# Altium PCB adapter.PcbDoc
Units mm, origin at the board's own origin, x right, y up, seen from the top; angles counter-clockwise.
Board outline 25.1 x 46.94 mm, 2 copper layers (Top Layer, Bottom Layer), stack 1.671 mm thick; 11 components, 28 nets, 88 pads, 25 vias.
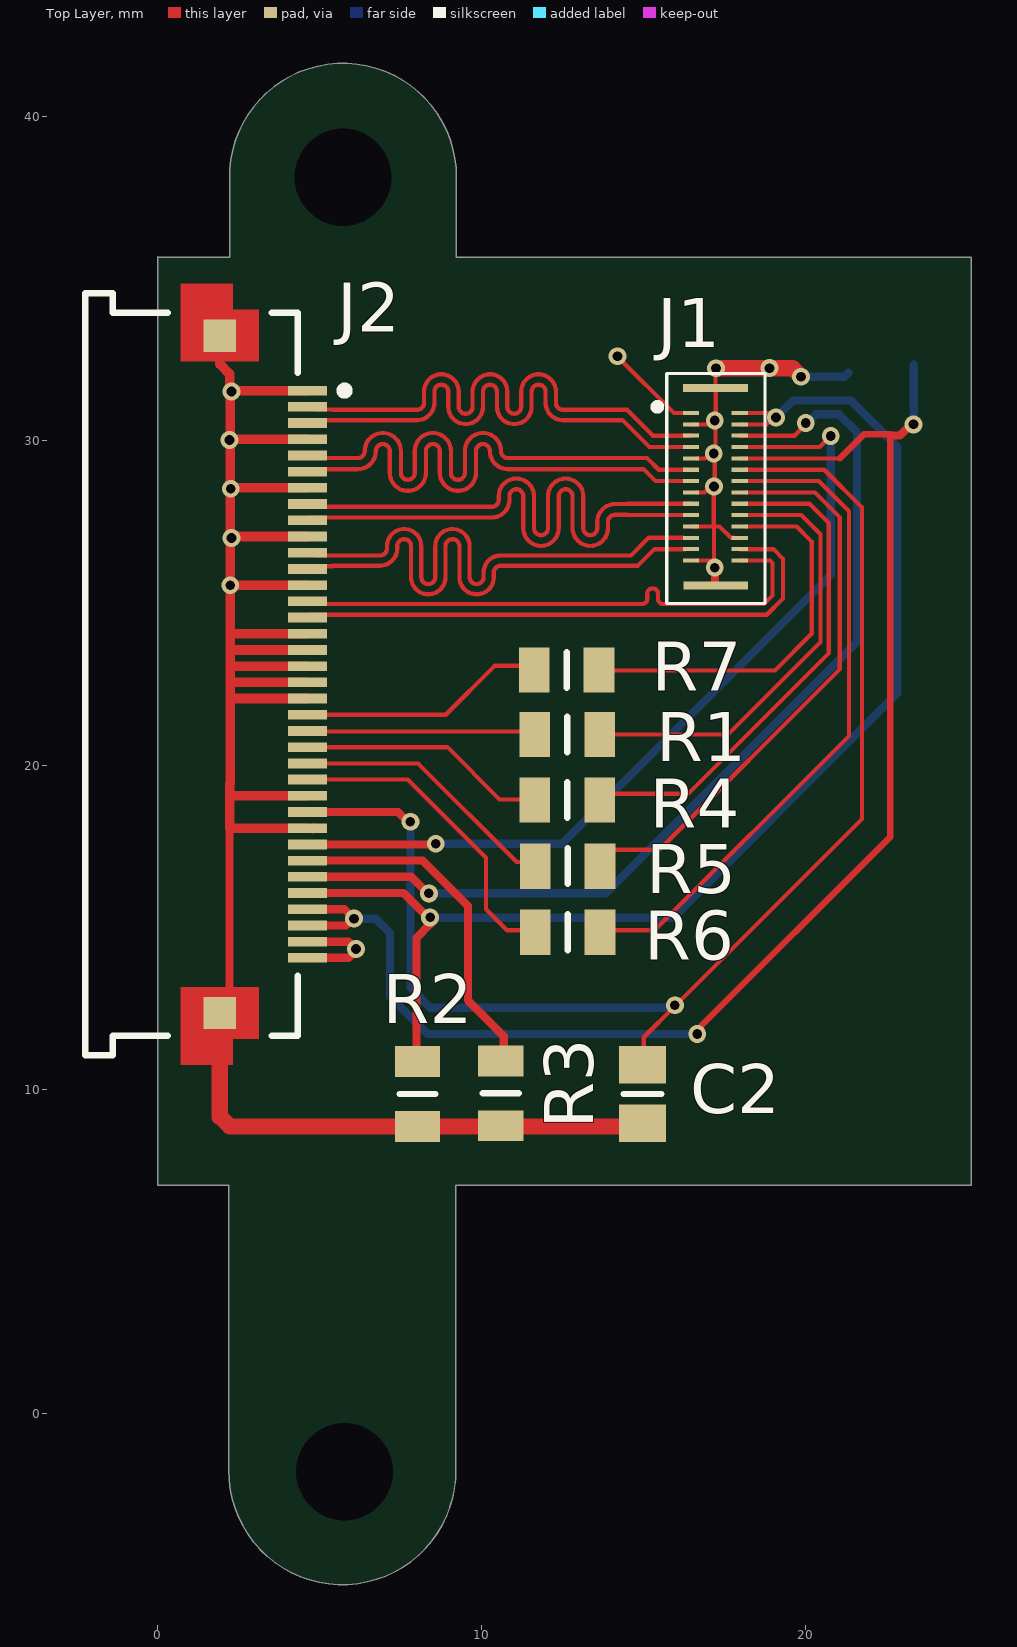
[diagram p0: Top Layer view]
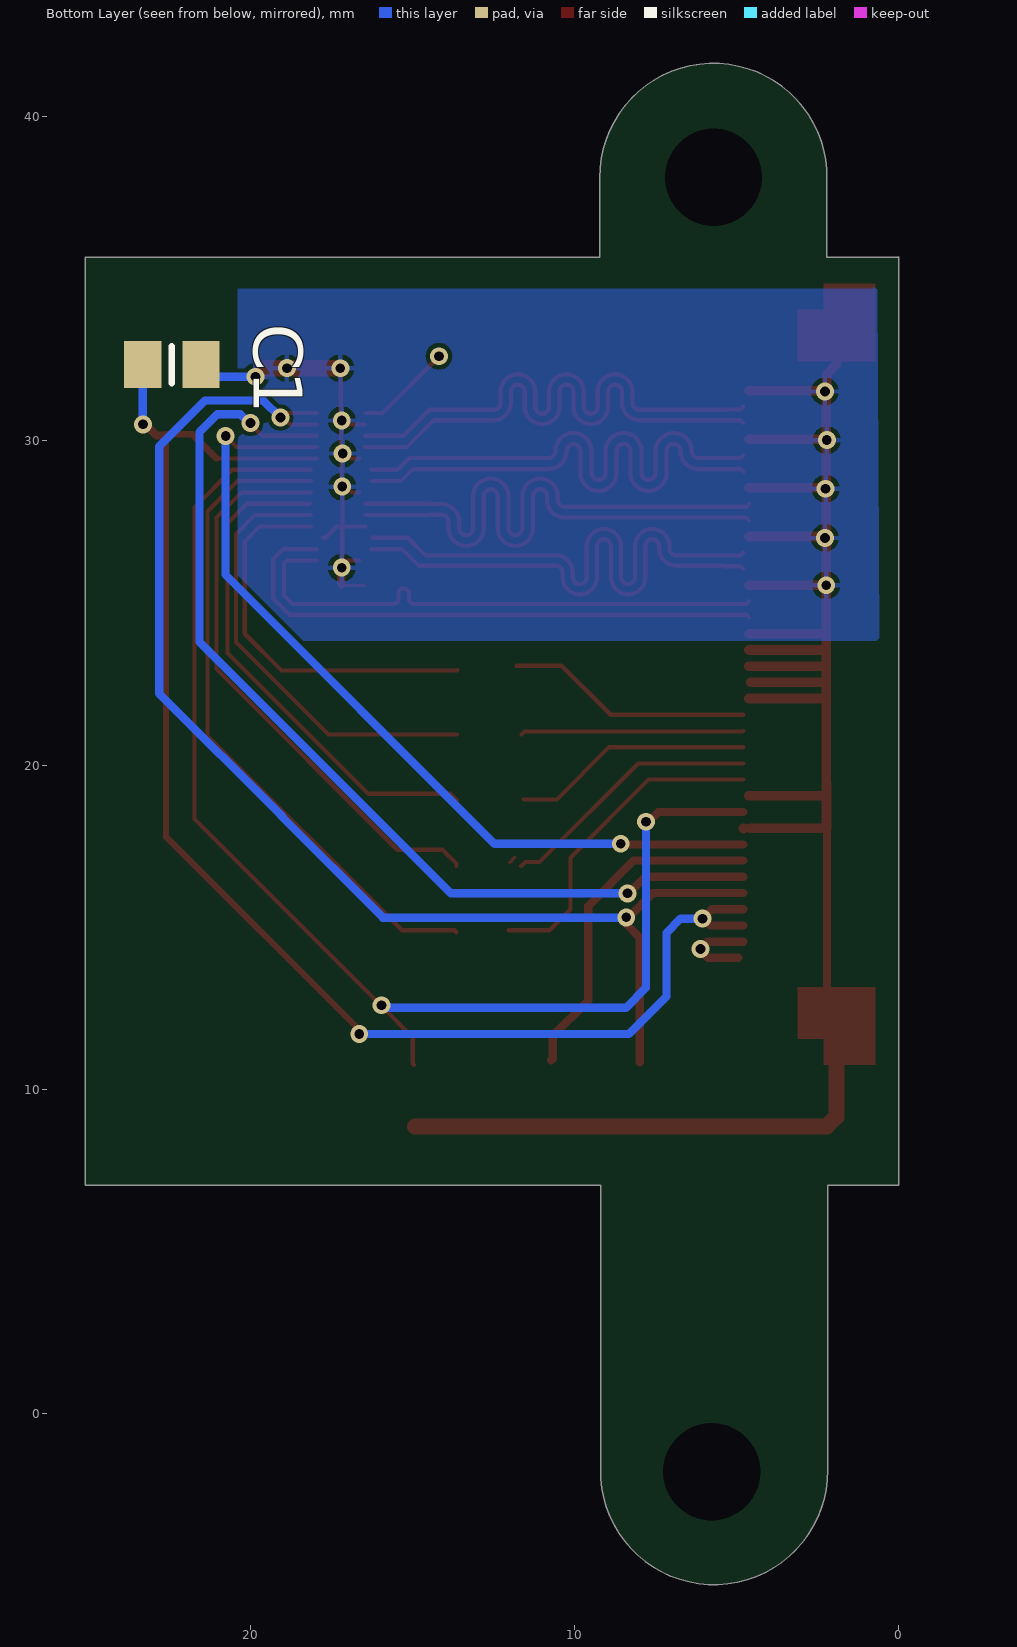
[diagram p1: Bottom Layer view, seen from below]
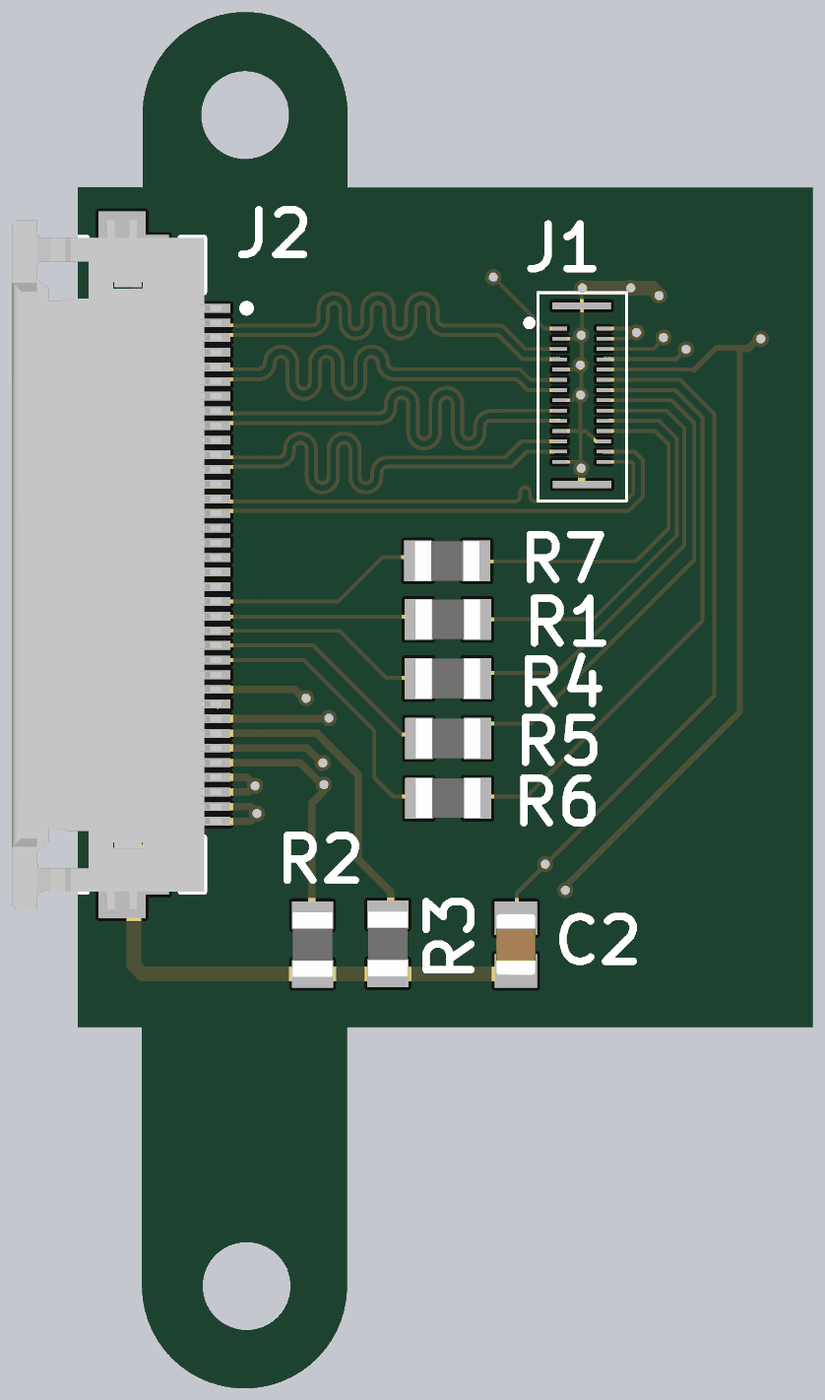
[diagram p2: 3D render of the assembled board from above, using the file's embedded part models]

## Layer stack, top to bottom
Top Solder: solder mask 0.0102, Solder Resist, Dk 3.5
Top Layer: signal copper 0.0356
Dielectric 1: dielectric 1.6, FR-4, Dk 4.8
Bottom Layer: signal copper 0.0356
Bottom Solder: solder mask 0.0102, Solder Resist, Dk 3.5

## Board outline
0,7.03 0,35.68 0,35.67 2.22,35.67 2.22,38.03 2.221,38.072 cw(c5.72,38.15) 9.22,38.118 9.22,38.09 9.22,35.67 25.1,35.67 25.1,7.03 9.2,7.03 9.2,-1.69 9.199,-1.712 cw(c5.7,-1.79) 2.2,-1.758 2.2,-1.74 2.2,7.03

## Design rules (kind name [scope] priority, off if disabled: settings)
Clearance "Schematic Clearance Constraint" [InNetClass('DPHY_LANES')] p1: gap=0.1 ignorepadtopadclearanceinfootprint=FALSE
Clearance [All] p2: gap=0.13 ignorepadtopadclearanceinfootprint=FALSE
DiffPairsRouting [All] p1: maxlimit=0.254 minlimit=0.13 mostfreqgap=0.2 toplayer_minwidth=0.13 toplayer_maxwidth=0.14 toplayer_prefwidth=0.13 bottomlayer_minwidth=0.13 bottomlayer_maxwidth=0.14 bottomlayer_prefwidth=0.13 maxuncoupledlength=12.7
MatchedLengths "Schematic Matched Net Lengths" [InNetClass('DPHY_LANES')] p1: tolerance=0.5 checknetsindiffpair=FALSE checkdiffpairvsdiffpair=TRUE checkxsignals=TRUE checkothers=TRUE
MatchedLengths global_rule [InDifferentialPairClass('All Differential Pairs')] p2: tolerance=0.5 checknetsindiffpair=FALSE checkdiffpairvsdiffpair=TRUE checkxsignals=TRUE checkothers=TRUE
MatchedLengths diff_pair_3 [InDifferentialPair('MIPI_TX_DATA3')] p3: tolerance=0.5 checknetsindiffpair=TRUE checkdiffpairvsdiffpair=FALSE checkxsignals=FALSE checkothers=FALSE
MatchedLengths diff_pair_4 [InDifferentialPair('MIPI_TX_DATA4')] p4: tolerance=0.5 checknetsindiffpair=TRUE checkdiffpairvsdiffpair=FALSE checkxsignals=FALSE checkothers=FALSE
MatchedLengths diff_pair_clk [InDifferentialPair('MIPI_TX_CLK')] p5: tolerance=0.5 checknetsindiffpair=TRUE checkdiffpairvsdiffpair=FALSE checkxsignals=FALSE checkothers=FALSE
MatchedLengths diff_pair_2 [InDifferentialPair('MIPI_TX_DATA2')] p6: tolerance=0.5 checknetsindiffpair=TRUE checkdiffpairvsdiffpair=FALSE checkxsignals=FALSE checkothers=FALSE
MatchedLengths diff_pair_1 [InDifferentialPair('MIPI_TX_DATA1')] p7: tolerance=0.5 checknetsindiffpair=TRUE checkdiffpairvsdiffpair=FALSE checkxsignals=FALSE checkothers=FALSE
MinimumSolderMaskSliver [All] p1: minsoldermaskwidth=0.05
PolygonConnect [All] p1: connectstyle=Relief reliefconductorwidth=0.15 reliefentries=4 polygonreliefangle="90 Angle" airgapwidth=0.15
RoutingVias [All] p1: holewidth=0.3 width=0.55 viastyle="Through Hole" minholewidth=0.3 minwidth=0.5 maxholewidth=0.3 maxwidth=0.7
SilkToSilkClearance [All] p1: silktosilkclearance=0.1
SilkToSolderMaskClearance [IsPad] p1: minsilkscreentomaskgap=0.1 clearancetoexposedcopper=TRUE
SolderMaskExpansion [All] p1: expansion=0.102 istentingtop=FALSE
UnRoutedNet [All] p1: checkbadconnections=TRUE
Width "Schematic Width Constraint_9" [InNet('LCD_PANIC_L_CONN')] p1: maxlimit=0.2 minlimit=0.1 preferedwidth=0.1
Width "Schematic Width Constraint_8" [InNet('LCD_HIFA_BSYNC_CONN')] p2: maxlimit=0.2 minlimit=0.1 preferedwidth=0.1
Width "Schematic Width Constraint_7" [InNet('DSI_GPIO0')] p3: maxlimit=0.2 minlimit=0.1 preferedwidth=0.1
Width "Schematic Width Constraint_6" [InNet('DSI_GPIO1')] p4: maxlimit=0.2 minlimit=0.1 preferedwidth=0.1
Width "Schematic Width Constraint_5" [InNet('LCD_PIFA')] p5: maxlimit=0.2 minlimit=0.1 preferedwidth=0.1
Width "Schematic Width Constraint_4" [InNet('DSI_GPIO2')] p6: maxlimit=0.2 minlimit=0.1 preferedwidth=0.1
Width "Schematic Width Constraint_3" [InNet('DSI_GPIO3')] p7: maxlimit=0.2 minlimit=0.1 preferedwidth=0.1
Width "Schematic Width Constraint" [InNetClass('DPHY_LANES')] p8: maxlimit=0.1 minlimit=0.1 preferedwidth=0.1
Width signals [InNetClass('signals')] p9: maxlimit=0.3 minlimit=0.1 preferedwidth=0.13
Width diff_pairs [InNetClass('Differential_pairs')] p10: maxlimit=0.13 minlimit=0.13 preferedwidth=0.13
Width misc [InNetClass('misc')] p11: maxlimit=0.254 minlimit=0.1 preferedwidth=0.13
25 further rules are at their usual default settings.

## Classes and differential pairs
net class misc_nets: DSI_GPIO0 DSI_GPIO1 DSI_GPIO2 DSI_GPIO3 DSI_RESET_N LCD_HIFA_BSYNC_CONN LCD_PANIC_L_CONN LCD_PIFA LCD_PWR_EN_CONN LCD_RESET_L_CONN
net class DPHY_LANES: DPHY_0_N DPHY_0_P DPHY_1_N DPHY_1_P DPHY_2_N DPHY_2_P DPHY_3_N DPHY_3_P DPHY_4_N DPHY_4_P
differential pair DPHY_4: +DPHY_4_P -DPHY_4_N
differential pair DPHY_3: +DPHY_3_P -DPHY_3_N
differential pair DPHY_2: +DPHY_2_P -DPHY_2_N
differential pair DPHY_1: +DPHY_1_P -DPHY_1_N
differential pair DPHY_0: +DPHY_0_P -DPHY_0_N

## Components (designator, comment, footprint, x,y, rotation, side; value= is the part's Value field where it differs from the comment)
C1 "100nF" CAPC2012X88N 22.43,32.35 r0 bottom
C2 "100nF" CAPC2012X88N 14.96,9.85 r90 top
J1 "AA22L-P028VA1" AA22L-P028VA1 15.5,23.97 r0 top
J2 "54104-3633" MOLX-54104-3633 3.27,22.8 r270 top
R1 "0" RESC2012X60N 12.64,20.94 r0 top
R2 "100" RESC2012X60N 8.02,9.85 r90 top
R3 "100" RESC2012X60N 10.59,9.87 r90 top
R4 "0" RESC2012X60N 12.64,18.92 r0 top
R5 "0" RESC2012X60N 12.65,16.88 r0 top
R6 "0" RESC2012X60N 12.65,14.84 r0 top
R7 "0" RESC2012X60N 12.62,22.93 r0 top

## Footprints (in the part's own frame and the unit in brackets; to place one, negate y for a bottom-side part, rotate by r counter-clockwise, add the part's x,y. Pads: shape width x height; smd on the part's side, far side on the other; paste and mask are expansions set on the pad)
AA22L-P028VA1 [mm]
  rect 0.5x0.125 smd: 1(2.46,6.89) 2(0.96,6.89) 3(2.46,6.54) 4(0.96,6.54) 5(2.46,6.19) 6(0.96,6.19) 7(2.46,5.84) 8(0.96,5.84) 9(2.46,5.49) 10(0.96,5.49) 11(2.46,5.14) 12(0.96,5.14) 13(2.46,4.79) 14(0.96,4.79) 15(2.46,4.44) 16(0.96,4.44) 17(2.46,4.09) 18(0.96,4.09) 19(2.46,3.74) 20(0.96,3.74) 21(2.46,3.39) 22(0.96,3.39) 23(2.46,3.04) 24(0.96,3.04) 25(2.46,2.69) 26(0.96,2.69) 27(2.46,2.34) 28(0.96,2.34)
  rect 2x0.25 smd: 29(1.72,1.57) 30(1.71,7.66)
  silkscreen extent -0.17,1.01 3.24,8.11, body extent -0.33,3.51 -0.33,3.51, height 0.25
CAPC2012X88N [mm] "Chip Capacitor, Body 2.0x1.25mm, IPC Medium Density"
  rect 1.15x1.45 smd: 1(-0.9,0) 2(0.9,0)
  silkscreen extent 0,-0.58 0,0.58, body extent -1.05,-0.67 1.05,0.68, height 0.9
MOLX-54104-3633 [mm] "FPC Connector, 36-Leads, Right Angle, Pitch 0.5 mm, Mated Height 2.0 mm, SMT"
  rect 0.3x1.2 smd: 1(-8.75,1.35) 2(-8.25,1.35) 3(-7.75,1.35) 4(-7.25,1.35) 5(-6.75,1.35) 6(-6.25,1.35) 7(-5.75,1.35) 8(-5.25,1.35) 9(-4.75,1.35) 10(-4.25,1.35) 11(-3.75,1.35) 12(-3.25,1.35) 13(-2.75,1.35) 14(-2.25,1.35) 15(-1.75,1.35) 16(-1.25,1.35) 17(-0.75,1.35) 18(-0.25,1.35) 19(0.25,1.35) 20(0.75,1.35) 21(1.25,1.35) 22(1.75,1.35) 23(2.25,1.35) 24(2.75,1.35) 25(3.25,1.35) 26(3.75,1.35) 27(4.25,1.35) 28(4.75,1.35) 29(5.25,1.35) 30(5.75,1.35) 31(6.25,1.35) 32(6.75,1.35) 33(7.25,1.35) 34(7.75,1.35) 35(8.25,1.35) 36(8.75,1.35)
  rect 1x1 smd mask+0: MP1(-10.45,-1.35) MP2(10.45,-1.35)
  Top Layer region: -9.65,-2.55 -9.65,-0.15 -11.25,-0.15 -11.25,-0.95 -12.05,-0.95 -12.05,-2.55
  Top Layer region: 9.65,-2.55 9.65,-0.15 11.25,-0.15 11.25,-0.95 12.05,-0.95 12.05,-2.55
  silkscreen extent -11.75,-5.5 11.75,2.63, body extent -11.75,-5.5 11.75,1.65, height 2.06
RESC2012X60N [mm] "Chip Resistor, EIA 0805, Metric 2012, Body 2.0x1.2mm, IPC Medium Density"
  rect 0.95x1.4 smd: 1(-1,0) 2(1,0)
  silkscreen extent 0,-0.55 0,0.55, body extent -1.1,-0.67 1.1,0.68, height 0.6

## Part data
C1 C2: library part CC0805_100NF_50V_10%_X7R_YUDEN_UMK212B7104KGH, "Non-polarised capacitor", Case=0805, Manufacturer="TAIYO YUDEN", Manufacturer Part Number=UMK212B7104KGH, Tolerance=±10%, Voltage=50V, Author="CERN DEM JLC", Component Type=Standard, ComponentHeight=1.35mm, CreateDate=23.04.2015, HelpURL=\\cern.ch\dfs\Applications\Altium\Datasheets\CC0805_TAIYO-YUDEN_UMK212B7104KGH.pdf, LatestRevisionDate=23.04.2015, Mounted=Yes, Part Description="SMD Multilayer Chip Ceramic Capacitor (High Dielectric Type) for Automotive / Industrial Applications", Part Number=CC0805_100NF_50V_10%_X7R_YUDEN_UMK212B7104KGH, Pin Count=2, Sense=No, SMD=Yes, Socket=No, Status="Not Recommended", TC=X7R
J2: "0.5 mm Pitch Easy-On(TM) Type FPC Connector, 2.0 mm Mated Height, Right Angle, ZIF, SMT, Top Contact, 36 Circuits, -40 to 85 degC, ELV and RoHS Compliant, Tape and Reel", Current (Max per Contact)=0.5A, Manufacturer=Molex, Supplier Part Number 1=538-54104-3633, Voltage (Max)=50V, Circuits (Loaded)=36, ComponentLink1Description="Manufacturer URL", ComponentLink1URL=http://www.molex.com/molex/index.jsp, ComponentLink2Description=Datasheet, ComponentLink2URL=http://www.molex.com/webdocs/datasheets/pdf/en-us/0541043633_FFC_FPC_CONNECTORS.pdf, ComponentLink3Description="Package Specification", ComponentLink3URL=http://www.molex.com/pdm_docs/sd/541043633_sd.pdf, Contact Position=Top, Durability (mating cycles max)=20, Entry Angle="90degrees Angle", Mated Height=2.00mm, Material - Metal="Phosphor Bronze", Material - Plating Mating="Silver, Tin-Bismuth", Material - Plating Termination="Silver, Tin-Bismuth", Mounting Technology="Surface Mount", Number of Rows=1, Orientation="Right Angle", PackageDescription="36-Lead FPC Connector, Pitch 0.5 mm", PackageReference=54104-3633, PackageVersion="Rev. C, 04/2014", Packing="Tape and Reel", PartNumber=54104-3633, PCB Locator=No, PCB Retention=None, Pitch - Mating Interface=0.50mm, Pitch - Termination Interface=0.50mm, Polarized to PCB=Yes, RoHS=TRUE, Stackable=No, Supplier 1=Mouser
R1 R4 R5 R6 R7: library part R0805_0R_JUMPER, "Resistor", Case=0805, Manufacturer=GENERIC, Manufacturer1 ComponentHeight=0.6mm, Manufacturer1 Example="NIC COMPONENT", Manufacturer1 Part Number=NRC10Z0, Author="CERN DEM JLC", Component Type=Standard, CreateDate=03.12.2007, HelpURL=\\cern.ch\dfs\Applications\Altium\Datasheets\R0805_NIC_NRC.pdf, LatestRevisionDate=13.03.2008, Manufacturer Part Number=R0805_0R_JUMPER, Mounted=Yes, Part Description="2A (0.05R Max DC Resistance) Zero Ohm Jumper", Part Number=R0805_0R_JUMPER, Pin Count=2, PressFit=No, Sense=No, SMD=Yes, Socket=No, Status=Preferred
R2 R3: library part R0805_100R_1%_0.125W_100PPM, "Resistor - 1%", Case=0805, Manufacturer=GENERIC, Manufacturer1 ComponentHeight=0.6mm, Manufacturer1 Example="NIC COMPONENT", Manufacturer1 Part Number=NRC10F4700TRF, Power=0.125W, Tolerance=±1%, Author="CERN DEM JLC", Component Type=Standard, CreateDate=03.12.2007, HelpURL=\\cern.ch\dfs\Applications\Altium\Datasheets\R0805_NIC_NRC.pdf, LatestRevisionDate=13.03.2008, Manufacturer Part Number=R0805_100R_1%_0.125W_100PPM, Mounted=Yes, Part Description="General Purpose Thick Film Chip Resistor", Part Number=R0805_100R_1%_0.125W_100PPM, Pin Count=2, PressFit=No, Sense=No, SMD=Yes, Socket=No, Status=Preferred, TC=±100ppm/°C

## Free pads (board coordinates)
  round 1.524 hole 3 unplated: 1(5.72,38.137) 1(5.77,-1.803)

## Via types
v1: diameter 0.55, hole 0.3, Top Layer to Bottom Layer, tented both sides, 23 vias
v2: diameter 0.55, hole 0.3, Top Layer to Bottom Layer, 2 vias

## Nets (pads, with @x,y where several pads share a name; then routed paths per layer and width w, separated by ;. In a path a pad name is that pad's centre, name@x,y a point inside that pad or via, vN(x,y) a via of type N, cw(c..) or ccw(c..) an arc to the next point about the centre after c; other vN are vias at no path point)
1V8: C1.2 J1.9 J2.33 J2.34 | length 44.6
  Top Layer w0.13: v1(16.65,11.7) v1@16.65,11.83 ; J1.9 21.05,29.46
  Top Layer w0.2: v1@16.65,11.83 22.61,17.79 22.61,30.2 21.79,30.2 21.05,29.46
  Top Layer w0.254: J2.34@4.8,15.05 5.813,15.05 6.003,15.24 v1@6.07,15.24 ; J2.33@4.8,15.55 5.77,15.55 v1(6.06,15.26) ; 22.63,30.17 22.9,30.17 23.24,30.51 v1(23.32,30.51)
  Bottom Layer w0.254: v1@6.04,15.26 6.73,15.26 7.17,14.82 7.17,12.86 8.33,11.7 v1(16.65,11.7) ; v1(23.32,30.51) 23.33,30.52 C1.2
3V3: J2.35 J2.36 | length 2.7
  Top Layer w0.254: J2.35@4.8,14.55 5.89,14.55 6.14,14.3 5.89,14.05 J2.36@4.95,14.05
  other v2: 6.12,14.32
DPHY_0_N: J1.8 J2.3 | length 17.2
  Top Layer w0.13: J2.3@4.8,30.55 4.885,30.635 5.406,30.635 5.411,30.64 7.78,30.64 8.005,30.64 ccw(c8.005,31.175) 8.54,31.175 8.54,31.52 cw(c8.755,31.52) 8.97,31.52 8.97,31.052 ccw(c9.505,31.052) 10.04,31.052 10.04,31.52 cw(c10.255,31.52) 10.47,31.52 10.47,31.052 ccw(c11.005,31.052) 11.54,31.052 11.54,31.52 cw(c11.755,31.52) 11.97,31.52 11.97,31.175 ccw(c12.505,31.175) 12.505,30.64 13.169,30.64 14.348,30.64 15.178,29.81 J1.8
DPHY_0_P: J1.6 J2.2 | length 17.2
  Top Layer w0.13: J2.2@4.8,31.05 4.885,30.965 5.406,30.965 5.411,30.96 7.78,30.96 8.005,30.96 ccw(c8.005,31.175) 8.22,31.175 8.22,31.52 cw(c8.755,31.52) 9.29,31.52 9.29,31.052 ccw(c9.505,31.052) 9.72,31.052 9.72,31.52 cw(c10.255,31.52) 10.79,31.52 10.79,31.052 ccw(c11.005,31.052) 11.22,31.052 11.22,31.52 cw(c11.755,31.52) 12.29,31.52 12.29,31.175 ccw(c12.505,31.175) 12.505,30.96 13.169,30.96 14.48,30.96 15.28,30.16 J1.6
DPHY_1_N: J1.14 J2.6 | length 17
  Top Layer w0.13: J2.6@4.8,29.05 4.878,29.128 5.94,29.128 6.176,29.128 ccw(c6.176,29.685) 6.734,29.685 ; 6.734,29.686 cw(c6.949,29.686) 7.164,29.686 7.164,29.014 ccw(c7.721,29.014) 8.279,29.014 8.279,29.686 cw(c8.494,29.686) 8.709,29.686 8.709,29.014 ccw(c9.266,29.014) 9.824,29.014 9.824,29.686 cw(c10.039,29.686) 10.254,29.686 ; 10.254,29.685 ccw(c10.811,29.685) 10.811,29.128 11.625,29.128 14.993,29.128 15.36,28.76 J1.14@16.261,28.76
DPHY_1_P: J1.12 J2.5 | length 17
  Top Layer w0.13: J2.5@4.8,29.55 4.88,29.47 5.94,29.47 6.176,29.47 ccw(c6.176,29.685) 6.391,29.685 ; 6.391,29.686 cw(c6.949,29.686) 7.506,29.686 7.506,29.014 ccw(c7.721,29.014) 7.936,29.014 7.936,29.686 cw(c8.494,29.686) 9.051,29.686 9.051,29.014 ccw(c9.266,29.014) 9.481,29.014 9.481,29.686 cw(c10.039,29.686) 10.596,29.686 ; 10.596,29.685 ccw(c10.811,29.685) 10.811,29.47 11.625,29.47 15.103,29.47 15.463,29.11 J1.12@16.275,29.11
DPHY_2_N: J1.20 J2.9 | length 17.3
  Top Layer w0.13: J2.9 4.705,27.635 5.231,27.635 10.08,27.635 10.31,27.635 ccw(c10.31,28.18) 10.855,28.18 10.855,28.293 cw(c11.07,28.293) 11.07,28.508 cw(c11.07,28.293) 11.285,28.293 11.285,27.306 ccw(c11.83,27.306) 11.83,26.761 ccw(c11.83,27.306) 12.375,27.306 12.375,28.293 cw(c12.59,28.293) 12.59,28.508 cw(c12.59,28.293) 12.805,28.293 12.805,27.306 ccw(c13.35,27.306) 13.35,26.761 ccw(c13.35,27.306) 13.895,27.306 13.895,27.505 cw(c14.11,27.505) 14.11,27.72 14.481,27.72 14.491,27.71 14.793,27.71 J1.20
DPHY_2_P: J1.18 J2.8 | length 17.3
  Top Layer w0.13: J2.8 4.705,27.965 10.08,27.965 10.31,27.965 ccw(c10.31,28.18) 10.525,28.18 10.525,28.293 cw(c11.07,28.293) 11.07,28.838 cw(c11.07,28.293) 11.615,28.293 11.615,27.306 ccw(c11.83,27.306) 11.83,27.091 ccw(c11.83,27.306) 12.045,27.306 12.045,28.293 cw(c12.59,28.293) 12.59,28.838 cw(c12.59,28.293) 13.135,28.293 13.135,27.306 ccw(c13.35,27.306) 13.35,27.091 ccw(c13.35,27.306) 13.565,27.306 13.565,27.505 cw(c14.11,27.505) 14.11,28.05 14.481,28.05 14.491,28.06 14.793,28.06 J1.18
DPHY_3_N: J1.26 J2.12 | length 16.9
  Top Layer w0.13: J2.12@4.8,26.05 4.885,26.135 5.396,26.135 5.411,26.15 6.64,26.15 6.863,26.15 ccw(c6.863,26.68) 7.393,26.68 7.393,26.752 cw(c7.608,26.752) 7.823,26.752 7.823,25.795 ccw(c8.353,25.795) 8.883,25.795 8.883,26.752 cw(c9.098,26.752) 9.313,26.752 9.313,25.795 ccw(c9.842,25.795) 10.372,25.795 10.372,25.935 cw(c10.587,25.935) 10.587,26.15 11.288,26.15 14.82,26.15 15.33,26.66 J1.26@16.275,26.66
DPHY_3_P: J1.24 J2.11 | length 16.9
  Top Layer w0.13: J2.11@4.8,26.55 4.885,26.465 6.64,26.465 6.863,26.465 ccw(c6.863,26.68) 7.078,26.68 7.078,26.752 cw(c7.608,26.752) 8.138,26.752 8.138,25.795 ccw(c8.353,25.795) 8.568,25.795 8.568,26.752 cw(c9.098,26.752) 9.628,26.752 9.628,25.795 ccw(c9.842,25.795) 10.057,25.795 10.057,25.935 cw(c10.587,25.935) 10.587,26.465 11.288,26.465 14.605,26.465 15.15,27.01 J1.24@16.237,27.01
DPHY_4_N: J1.27 J2.14 | length 17.2
  Top Layer w0.13: J2.14 4.705,24.965 5.231,24.965 9.235,24.965 14.88,24.965 14.945,24.965 ccw(c14.945,25.13) 15.11,25.13 15.11,25.285 cw(c15.275,25.285) 15.275,25.45 cw(c15.275,25.285) 15.44,25.285 15.44,25.13 ccw(c15.605,25.13) 15.605,24.965 16.032,24.965 18.705,24.965 18.97,25.23 18.97,26.234 18.894,26.31 J1.27
DPHY_4_P: J1.25 J2.15 | length 17.6
  Top Layer w0.13: J2.15 4.705,24.635 9.372,24.635 11.37,24.635 13.51,24.635 18.795,24.635 19.3,25.14 19.3,26.361 19.001,26.66 J1.25
DSI_GPIO0: J2.22 R1.1 | length 6.9
  Top Layer w0.13: J2.22@4.8,21.05 4.82,21.03 11.55,21.03 R1.1
DSI_GPIO1: J2.23 R4.1 | length 7.4
  Top Layer w0.13: J2.23@4.8,20.55 8.94,20.55 10.55,18.94 R4.1@11.57,18.94
DSI_GPIO2: J2.24 R5.1 | length 8.4
  Top Layer w0.1: R5.1@11.85,17.15 R5.1@12.01,16.99
  Top Layer w0.13: J2.24@4.8,20.05 8.04,20.05 11.084,17.006 11.524,17.006 R5.1
DSI_GPIO3: J2.25 R6.1 | length 10.1
  Top Layer w0.13: J2.25@4.8,19.55 7.72,19.55 10.13,17.14 10.13,15.55 10.78,14.9 R6.1@12.04,14.9
DSI_RESET_N: J2.21 R7.1 | length 7.6
  Top Layer w0.13: J2.21@4.8,21.55 8.89,21.55 10.4,23.06 R7.1@11.8,23.06
GND: C1.1 C2.1 J1.4 J1.10 J1.16 J1.22 J1.23 J1.28 J1.29 J1.30 J2.1 J2.4 J2.7 J2.10 J2.13 J2.16 J2.17 J2.18 J2.19 J2.20 J2.26 J2.28 J2.MP1 J2.MP2 R2.1 R3.1 | length 81.8
  Top Layer w0.1: J1.29@16.49,25.535 J1.29@17.15,25.535
  Top Layer w0.13: C2.1 C2.1@14.979,8.969 ; J1.22 17.17,27.36 ; J1.4 16.956,30.51 17.107,30.661 17.221,30.661 17.221,31.699 J1.30@17.21,31.71 ; J1.28@16.645,26.31 v1@17.17,26.31 ; J1.16@16.645,28.41 16.876,28.41 17.056,28.59 v1(17.17,28.59) ; J1.10@16.645,29.46 16.896,29.46 17.046,29.61 v1(17.16,29.61) ; v1@17.17,26.1 v1@17.17,26.31 ; v1@17.211,30.649 17.211,29.661 v1(17.16,29.61) ; J1.30@17.211,31.711 17.211,32.221 v1(17.23,32.24) ; J1.23@17.775,27.01 17.69,27.01 17.34,27.36 17.17,27.36 ; v1(17.16,29.61) 17.191,29.579 17.191,28.611 v1(17.17,28.59) ; v1@17.17,26.31 17.17,27.36 ; 17.17,27.36 17.16,27.37 17.16,28.58 v1(17.17,28.59)
  Top Layer w0.254: 1.83,9.05 1.92,9.14 ; J2.MP2 2.22,12.65 2.22,18.12 ; v1(17.19,26.09) 17.2,26.08 J1.29@17.2,25.58
  Top Layer w0.3: J2.MP1 1.92,32.369 2.223,32.066 2.223,31.597 v1@2.27,31.55 ; 2.24,29.055 v1@2.24,28.54 ; 2.24,29.09 v1@2.24,30.05 ; v1@2.24,31.55 v1@2.24,30.05 ; v1(2.28,31.525) 2.305,31.55 4.082,31.55 J2.1 ; J2.19@4.56,22.55 2.24,22.55 ; J2.28@4.598,18.05 2.23,18.05 2.23,19.05 ; J2.26 2.23,19.05 ; J2.20 2.24,22.05 ; J2.18 2.24,23.05 ; J2.17 2.26,23.55 2.24,23.57 ; J2.16 2.27,24.05 2.24,24.08 ; J2.13 2.25,25.55 v1@2.24,25.54 ; J2.10 2.25,27.05 v1@2.24,27.06 ; J2.7 2.25,28.55 v1@2.24,28.54 ; J2.4 v1@2.24,30.05 ; J2.28@4.79,18.04 J2.28@4.8,18.05 ; 2.23,19.05 2.23,19.411 2.24,19.421 2.24,22.05 ; 2.24,22.05 2.24,22.55 ; 2.24,22.55 2.24,23.05 ; 2.24,23.05 2.24,23.57 ; 2.24,23.57 2.24,24.08 ; 2.24,24.08 v1@2.24,25.54 ; v1@2.24,25.54 v1@2.24,27.06 ; v1@2.24,27.06 v1@2.24,28.54
  Top Layer w0.5: 1.92,9.14 J2.MP2 ; 1.93,9.143 2.223,8.85 R2.1 C2.1@14.93,8.85 ; v1(17.23,32.24) 19.6,32.24 v1@19.84,32
  Bottom Layer w0.254: v1(19.85,31.98) 21.19,31.98 C1.1@21.31,32.1
  other v1: 2.24,25.545 2.28,27.005 2.26,28.525 2.22,30.025 17.19,30.63 18.88,32.245
LCD_BL_A: J1.5 J2.31 | length 30.8
  Top Layer w0.13: J1.5 19.65,30.16 20,30.51 v1(20,30.55)
  Top Layer w0.254: J2.31@4.8,16.55 7.83,16.55 v1@8.315,16.065
  Bottom Layer w0.254: v1(8.37,16.04) 13.82,16.04 21.58,23.8 21.58,30.27 21.03,30.82 20.31,30.82 20.04,30.55 v1(20,30.55)
LCD_BL_FB: J1.1 J1.3 J2.32 R2.2 | length 40.5
  Top Layer w0.13: J1.3 18.784,30.51 18.994,30.72 19.11,30.72 18.97,30.86 J1.1
  Top Layer w0.254: J2.32@4.8,16.05 7.59,16.05 8.34,15.3 v1(8.41,15.3) 8.41,15.09 7.99,14.67 R2.2@7.99,10.83
  Bottom Layer w0.254: v1@8.41,15.29 15.92,15.29 19.08,18.45 ; 19.02,18.41 22.82,22.21 22.82,29.83 21.4,31.25 19.61,31.25 v1(19.08,30.72)
LCD_BOOST_FB: J2.30 R3.2 | length 10.6
  Top Layer w0.254: J2.30@4.8,17.05 8.18,17.05 9.58,15.65 9.58,12.74 10.68,11.64 10.68,10.94 R3.2@10.73,10.89
LCD_HIFA_BSYNC_CONN: J1.17 R4.2 | length 15.7
  Top Layer w0.13: R4.2 13.83,19.11 16.36,19.11 20.71,23.46 20.71,27.46 20.11,28.06 J1.17@18.172,28.06
LCD_MVDRV: J1.7 J2.29 | length 26.7
  Top Layer w0.13: J1.7 20.43,29.81 v1@20.76,30.14
  Top Layer w0.254: J2.29@4.8,17.55 8.57,17.55 v1@8.58,17.56
  Bottom Layer w0.254: v1(8.58,17.57) 12.47,17.57 20.77,25.87 v1(20.77,30.15) 20.77,30.17 v1@20.72,30.22
LCD_PANIC_L_CONN: J1.19 R1.2 | length 13.9
  Top Layer w0.13: R1.2 17.6,20.94 20.45,23.79 20.45,27.12 19.86,27.71 J1.19@18.145,27.71
LCD_PIFA: J1.15 R5.2 | length 17.9
  Top Layer w0.13: R5.2 13.65,16.961 14.075,17.386 15.476,17.386 21.05,22.96 21.05,27.64 20.28,28.41 J1.15@18.145,28.41
LCD_PVDRV: C2.2 J1.11 J2.27 | length 40.8
  Top Layer w0.13: C2.2 15,10.79 15,11.6 15.975,12.575 21.73,18.33 21.73,27.95 20.57,29.11 J1.11@18.145,29.11
  Top Layer w0.254: J2.27@4.8,18.55 7.42,18.55 7.75,18.22 v1@7.83,18.22
  Bottom Layer w0.254: v1(7.8,18.25) 7.8,13.13 8.42,12.51 15.88,12.51 v1@15.93,12.56
  other v1: 15.96,12.59
LCD_PWR_EN_CONN: J1.13 R6.2 | length 20.7
  Top Layer w0.13: R6.2 13.71,14.9 15.33,14.9 21.33,20.9 21.33,27.83 20.4,28.76 J1.13@18.145,28.76
LCD_RESET_L_CONN: J1.21 R7.2 | length 12.1
  Top Layer w0.13: R7.2 13.63,22.92 19.05,22.92 20.18,24.05 20.18,26.9 19.72,27.36 J1.21@18.145,27.36
pads on no net: J1.2
copper on no net: | length 3
  Top Layer w0.13: v2@14.21,32.58 15.93,30.86 16.46,30.86
  other v2: 14.19,32.61

## Polygon pours and split planes (outlines as drawn)
GND on Bottom Layer "GND_L02_P000" (solid, pour order 0): 0.66,34.85 0.82,34.69 20.39,34.69 20.39,24.35 20.49,24.25 20.08,23.84 0.6,23.84

## Silkscreen, mask and mechanical layers (free items; w line width, h text height)
Mechanical 8:
  lines w0.254: 0,35.67 2.22,35.67 2.22,38.03 ; 0,35.68 0,7.03 2.2,7.03 ; 2.2,-1.758 ccw(c5.7,-1.79) 9.199,-1.712 ; 2.2,-1.74 2.2,7.02 ; 2.221,38.072 cw(c5.72,38.15) 9.22,38.118 ; 9.2,-1.69 9.2,7.03 25.1,7.03 25.1,35.67 9.22,35.67 9.22,38.09